# Altium PCB 1.PcbDoc
Units mm, origin at the board's own origin, x right, y up, seen from the top; angles counter-clockwise.
Board outline 91 x 97 mm, 2 copper layers (Top Layer, Bottom Layer); 12 components, 21 nets, 85 pads, 0 vias.
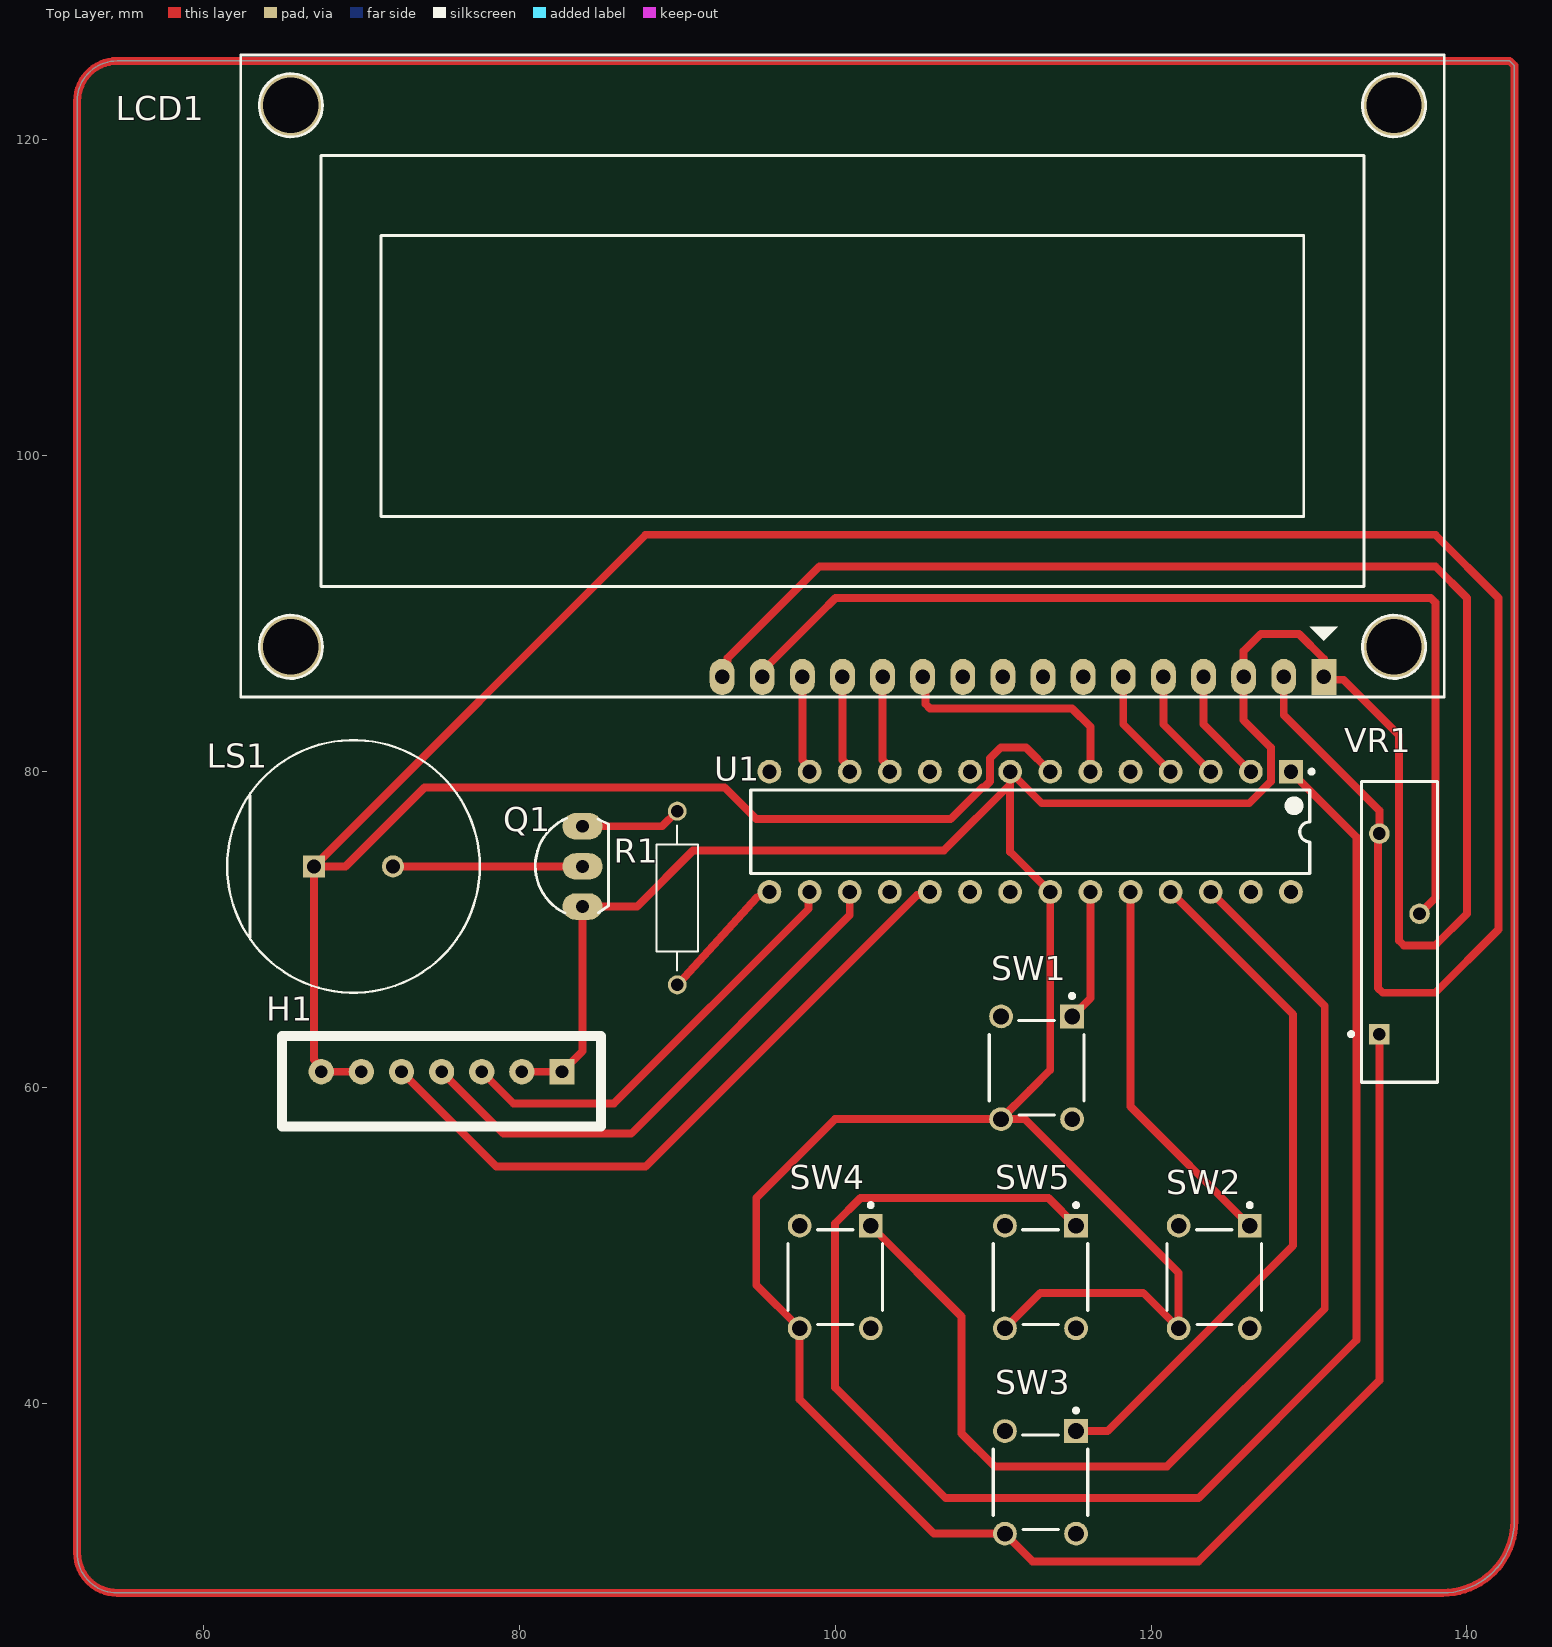
[diagram p0: Top Layer view]
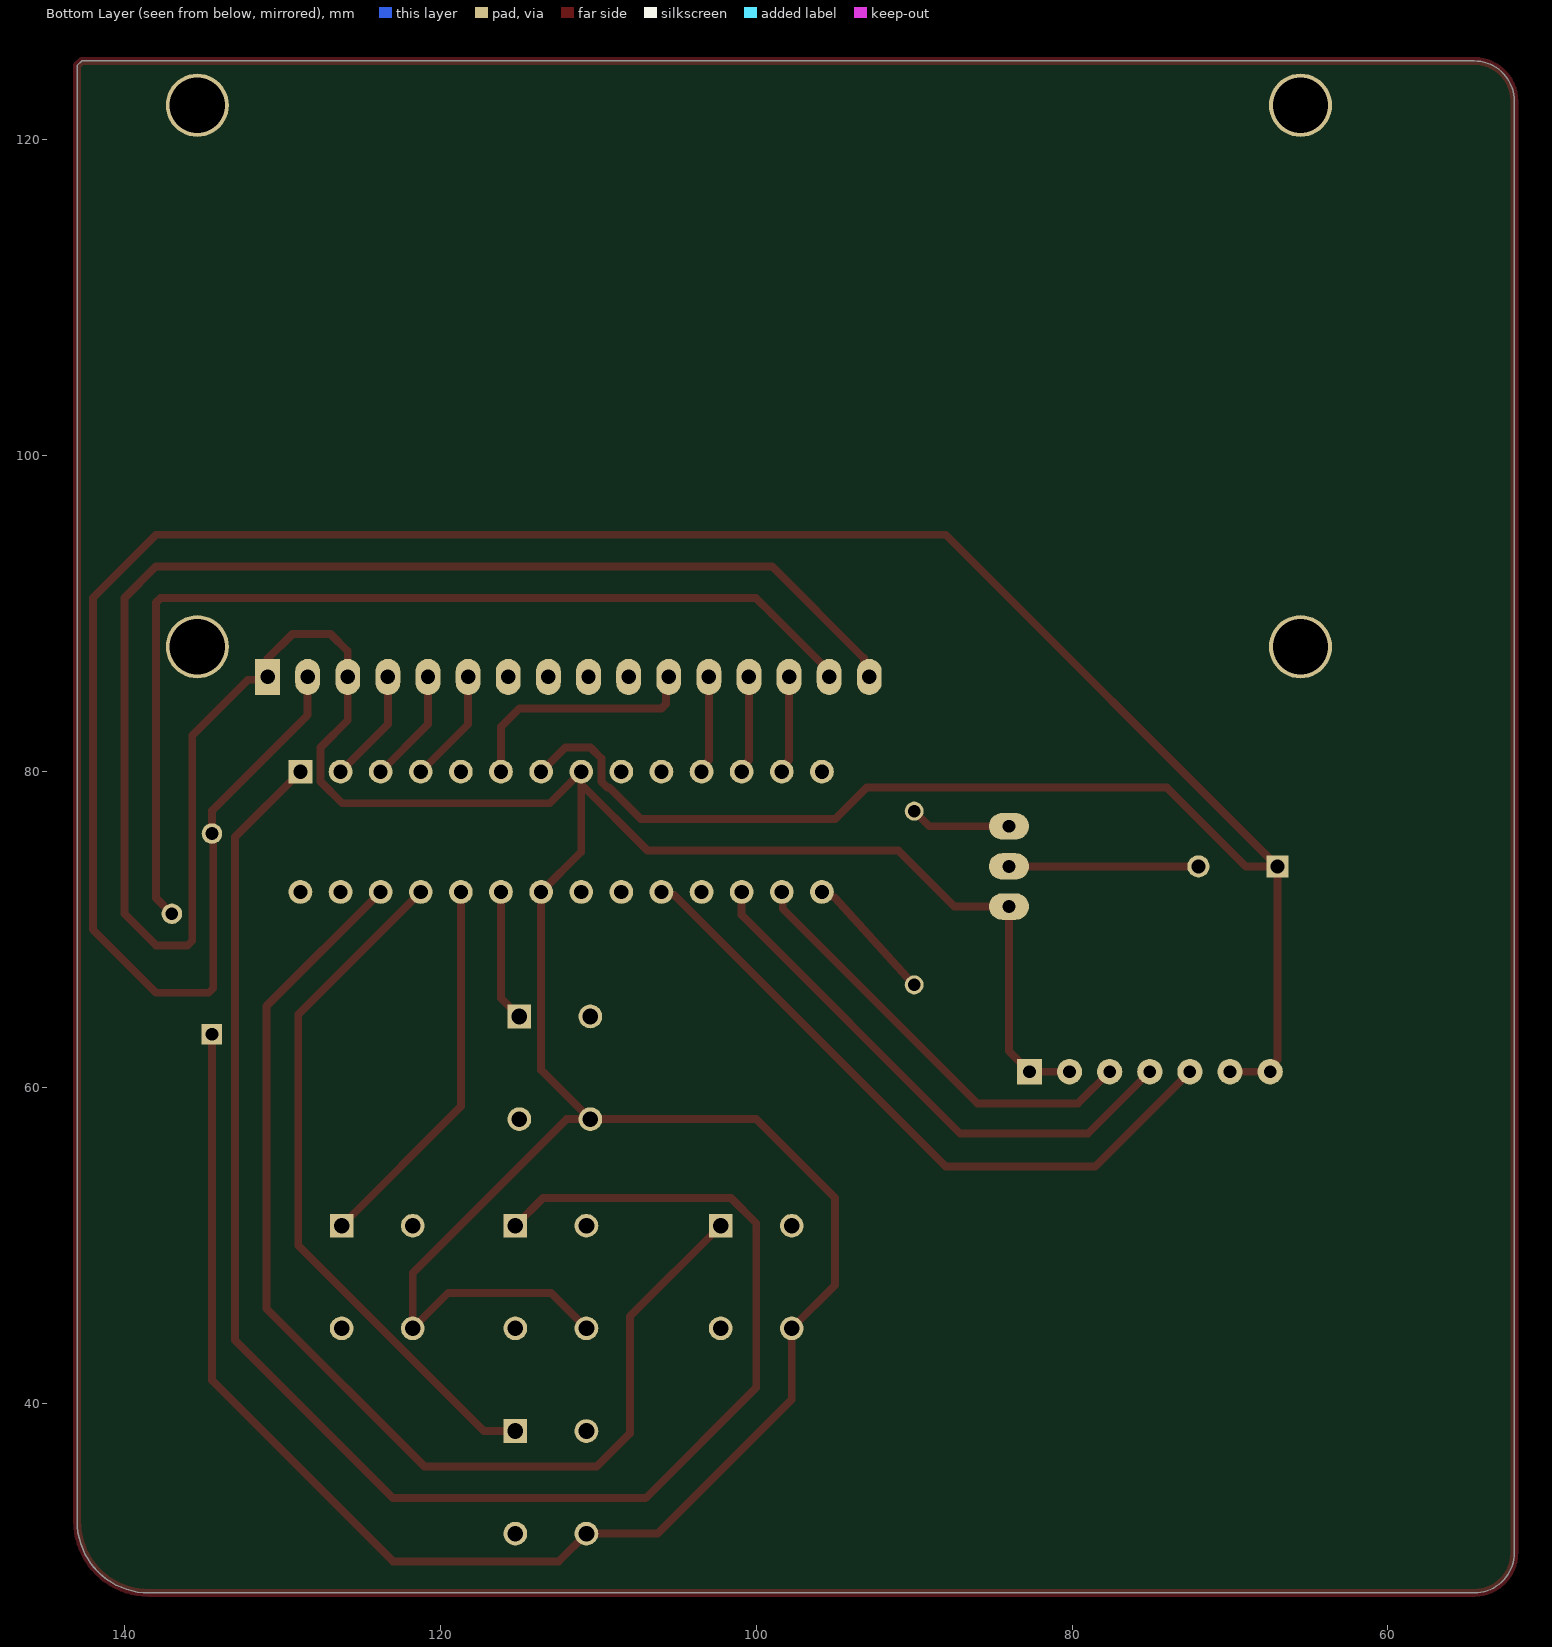
[diagram p1: Bottom Layer view, seen from below]

## Layer stack, top to bottom
Top Solder: solder mask 0.0102, Solder Resist, Dk 3.5
Top Layer: signal copper 0.0356
Dielectric 1: dielectric 0.32, FR-4, Dk 4.8
Bottom Layer: signal copper 0.0356
Bottom Solder: solder mask 0.0102, Solder Resist, Dk 3.5

## Board outline
52,30.54 52,122.46 cw(c54.54,122.46) 54.54,125 142.707,125 143,124.707 143,32.54 cw(c138.46,32.54) 138.46,28 54.54,28 cw(c54.54,30.54)

## Design rules (kind name [scope] priority, off if disabled: settings)
Clearance [All] p1: gap=0.254 ignorepadtopadclearanceinfootprint=FALSE
PolygonConnect [All] p1: connectstyle=Relief reliefconductorwidth=0.254 reliefentries=4 polygonreliefangle="90 Angle" airgapwidth=0.254
RoutingLayers [All] p1: top layer_v5=TRUE bottom layer_v5=FALSE
RoutingVias [All] p1: holewidth=0.711 width=1.27 viastyle="Through Hole" minholewidth=0.711 minwidth=1.27 maxholewidth=0.711 maxwidth=1.27
SolderMaskExpansion [All] p1: expansion=0.102 istentingtop=FALSE
SupplyNets "Schematic Supply Nets_1" [InNet('VCC')] p1: voltage=0.000
SupplyNets "Schematic Supply Nets" [InNet('GND')] p2: voltage=0.000
Width [All] p1: maxlimit=0.5 minlimit=0.5 preferedwidth=0.5
29 further rules are at their usual default settings.

## Classes and differential pairs
component class 1: H1 LCD1 LS1 Q1 R1 SW1 SW2 SW3 SW4 SW5 VR1

## Components (designator, comment, footprint, x,y, rotation, side; value= is the part's Value field where it differs from the comment)
H1 "Header 7P 2.54 Duc Thang" XH2.54M-7 82.7,61 r180 top
LCD1 "LCD1602 XL" LCD1602 130.94,86 r180 top
LS1 "SD1614TT-A5ME" FP-SD1614TT-A5ME-MFG 69.5,74 r0 top
Q1 "C1815" TO92 84,74 r90 top value=C9014
R1 "MFR-25FBF52-1K" RESAD1100W55L680D260 90,72 r90 top
SW1 "1825910-6" TECO-1825910-6_V 112.75,61.25 r270 top
SW2 "1825910-6" TECO-1825910-6_V 124,48 r270 top
SW3 "1825910-6" TECO-1825910-6_V 113,35 r270 top
SW4 "1825910-6" TECO-1825910-6_V 100,48 r270 top
SW5 "1825910-6" TECO-1825910-6_V 113,48 r270 top
U1 "ATmega328-PU" 28P3 112.35,76.19 r270 top
VR1 "3006P-1-201ZLF" BOUR-3006P-3_V 135.73,69.855 r90 top

## Footprints (in the part's own frame and the unit in brackets; to place one, negate y for a bottom-side part, rotate by r counter-clockwise, add the part's x,y. Pads: shape width x height; smd on the part's side, far side on the other; paste and mask are expansions set on the pad)
28P3 [mm] "28-Pin Plastic Dual In-Line Package (PDIP)"
  rect 1.5x1.5 hole 0.9: 1(-3.81,16.51)
  round 1.5 hole 0.9: 2(-3.81,13.97) 3(-3.81,11.43) 4(-3.81,8.89) 5(-3.81,6.35) 6(-3.81,3.81) 7(-3.81,1.27) 8(-3.81,-1.27) 9(-3.81,-3.81) 10(-3.81,-6.35) 11(-3.81,-8.89) 12(-3.81,-11.43) 13(-3.81,-13.97) 14(-3.81,-16.51) 15(3.81,-16.51) 16(3.81,-13.97) 17(3.81,-11.43) 18(3.81,-8.89) 19(3.81,-6.35) 20(3.81,-3.81) 21(3.81,-1.27) 22(3.81,1.27) 23(3.81,3.81) 24(3.81,6.35) 25(3.81,8.89) 26(3.81,11.43) 27(3.81,13.97) 28(3.81,16.51)
  silkscreen extent -3.93,-17.7 2.65,17.94, body extent -3.6,-17.65 3.6,17.65, height 4.58
BOUR-3006P-3_V [mm] "THD, 3-Leads, Body 19.05x4.83mm, Height 6.6mm"
  rect 1.3x1.3 hole 0.8: 1(-6.475,1.27)
  round 1.3 hole 0.8: 2(1.145,-1.27) 3(6.225,1.27)
  silkscreen extent -9.53,-2.42 9.52,3.19, body extent -9.53,-2.41 11.05,2.41, height 6.6
FP-SD1614TT-A5ME-MFG [mm]
  rect 1.4x1.4 hole 0.9 paste-2539.97 mask+0: 1(-2.5,0)
  round 1.4 hole 0.9 paste-2539.97 mask+0: 2(2.5,0)
  silkscreen extent -8,-8 8,8, body extent -8.1,-8.1 8.1,8.1, height 0.25
LCD1602 [mil] "LCD dipslay 16x2, 16 pin"
  rect 62x90 hole 36: 1(0,0)
  oval 62x90 hole 36: 2(100,0) 3(200,0) 4(300,0) 5(400,0) 6(500,0) 7(600,0) 8(700,0) 9(800,0) 10(900,0) 11(1000,0) 12(1100,0) 13(1200,0) 14(1300,0) 15(1400,0) 16(1500,0)
  round 157.48 hole 137.8: "Hole 0"(-175,-75) "Hole 0"(-175,-1425) "Hole 0"(2575,-1425) "Hole 0"(2575,-75)
  silkscreen extent -300,-1550 2700,50, body extent -315,-1360 2855,77, height 414
RESAD1100W55L680D260 [mm]
  round 1.2 hole 0.8: 1(-5.5,0) 2(5.5,0)
  silkscreen extent -4.58,-1.3 4.58,1.3, body extent -5.77,-1.2 5.77,1.2, height 2.4
TECO-1825910-6_V [mm] "Switch, 4-Leads, Body 5.99x5.99mm"
  rect 1.5x1.5 hole 0.99: 1(-3.25,2.25)
  round 1.5 hole 0.99: 2(3.25,2.25) 3(-3.25,-2.25) 4(3.25,-2.25)
  silkscreen extent -4.67,-2.99 3,3, body extent -3,-2.99 2.99,3, height 5
TO92 [mil] "TO-92"
  oval 66x100 hole 32: 1(-100,0) 2(0,0) 3(100,0)
  silkscreen extent -117,-65 120,118, body extent -109,-66 109,95, height 245
XH2.54M-7 [mm]
  rect 1.6x1.6 hole 0.8: 1(0,0)
  round 1.6 hole 0.8: 2(2.54,0) 3(5.08,0) 4(7.62,0) 5(10.16,0) 6(12.7,0) 7(15.24,0)
  silkscreen extent -2.48,-2.26 17.72,3.46, body extent -2.48,-2.26 17.72,3.48, height 6.91

## Part data
H1: "Cắm", Chung_Loai=Cắm, Don_Vi=Con, Ma_Hang=MH003369, Ten_Linh_Kien="Header 7P XH2.54-7P Đực Thẳng"
LCD1: "LCD 1602 Xanh Lá", CHIP=HD44780, Ma_Hang=67HZ, NCC=NSHOP, Ten="Màn hình LCD 1602 Xanh Lá"
LS1: library part CMP-08413-000006-1, "BUZZER MAGNETIC 5V 80DB 2048HZ 1"
Q1: "NPN transistor"
R1: "1.07 kOhms Â±1% 0.25W, 1/4W Through Hole Resistor Axial - Metal Film", Package="RADIAL-2 YAGEO", Check_prices=https://www.snapeda.com/parts/MFR-25FBF52-1K/Yageo/view-part/?ref=eda, MF=Yageo, MP=MFR-25FBF52-1K, SnapEDA_Link=https://www.snapeda.com/parts/MFR-25FBF52-1K/Yageo/view-part/?ref=snap
SW1 SW2 SW3 SW4 SW5: library part CMP-1684-00021-1, "Tact Switch, SPST-NO, 0.05 A, -35 to 85 degC, 4-Pin THD, RoHS, Bulk", Actuator Color=Black, Contact Rating @ Voltage=0.05A@24VDC, Dielectric Strength=500VAC, Manufacturer="TE Connectivity", Maximum AC Voltage Rating=N/A, Maximum Contact Resistance=100mOhm, Maximum DC Voltage Rating=24V, Minimum Insulation Resistance=100MOhm, Operating Temperature=-35to85C, Package Description="4-Pin Through Hole Device, Body 5.99 x 5.99 mm, Pitch 6.5 mm", Package Reference=THD, Actuator Length=1.4mm, Actuator Material=PolybutyleneTerephthalate, Actuator Style=RoundButton, Base Material=N/A, Body Orientation=Straight, Bushing Type=Unthreaded, Contact Material=CopperAlloy, Contact Plating=Silver, Datasheet URL=http://www.te.com/commerce/DocumentDelivery/DDEController?Action=showdoc&DocId=Customer+Drawing%7F1825910%7FC9%7Fpdf%7FEnglish%7FENG_CD_1825910_C9.pdf%7F1825910-6, Datasheet Version="Rev. C9", Dimension=5.99x5mm, Electrical Life=100000Cycles, Family=1825910, Function=MomentaryContact, Housing Material=N/A, Illumination=N/R, Manufacturer URL=http://www.te.com, Mechanical Life=100000Cycles, Mounting=ThroughHole, Packaging=N/A, Part No=1825910-6, Pole Throw Configuration=SPST, Product Weight=N/A, RoHS=Yes, Seal Description=N/A, Seal Location=N/A, Switch Configuration=OFF(ON), Terminal Type=PCPins, Thread Size=N/R
U1: library part CMP-0095-00015-2, "8-bit AVR Microcontroller, 32KB Flash, 1KB EEPROM, 2KB SRAM, 28-pin PDIP, Industrial Grade (-40°C to 85°C)", ComponentLink1Description="Manufacturer URL", ComponentLink1URL=http://www.atmel.com/, ComponentLink2Description="ATmega48A/48PA/88A/88PA/168A/168PA/328/328P Datasheet", ComponentLink2URL=http://www.atmel.com/dyn/resources/prod_documents/8271.pdf, ComponentLink3Description="ATmega48A/48PA/88A/88PA/168A/168PA/328/328P Summary", ComponentLink3URL=http://www.atmel.com/dyn/resources/prod_documents/8271S.pdf, DatasheetVersion="revD, May-2011", PackageDescription="28-lead (0.300\"/7.62mm Wide) Plastic Dual Inline Package (PDIP)", PackageReference=28P3, PackageVersion="revB, Sep-2001", RevisionNote="DatasheetVersion updated. URLs added."
VR1: library part CMP-0975-00016-2, "Trimming Potentiometer, 200 Ohm +/- 10%, -55 to 125 degC, 3-Pin 19.05 x 4.83 x 6.6 mm THD, RoHS", Manufacturer=Bourns, Resistance (Ohm)=200, Resistance Tolerance="+/- 10%", Temperature Range="-55 to 125 degC", ComponentLink1Description="Manufacturer URL", ComponentLink1URL=http://www.bourns.com/, ComponentLink2Description=Datasheet, ComponentLink2URL=http://www.bourns.com/data/global/pdfs/3006.pdf, ComponentLink3Description="Package Specification", ComponentLink3URL=http://www.bourns.com/data/global/pdfs/3006.pdf, DatasheetVersion=Apr-14, Mounting Technology="Through Hole", Number of Turns=15, PackageDescription="3-Pin THD, Body 19.05 x 4.83 mm, Height 6.6 mm", PackageReference=3006P-3, PackageVersion=Apr-14, PartNumber=3006P-1-201ZLF, RoHS=TRUE, Rotational Life="200 Cycles"

## Nets (pads, with @x,y where several pads share a name; then routed paths per layer and width w, separated by ;. In a path a pad name is that pad's centre, name@x,y a point inside that pad or via, vN(x,y) a via of type N, cw(c..) or ccw(c..) an arc to the next point about the centre after c; other vN are vias at no path point)
GND: H1.1 H1.2 LCD1.1 LCD1.3 LCD1.16 Q1.1 SW1.4 SW2.4 SW3.4 SW4.4 SW5.4 U1.8 U1.22 VR1.1 | length 329
  Top Layer w0.5: H1.2 H1.1 84,62.3 Q1.1 87.46,71.46 91,75 106.879,75 111.08,79.201 ; LCD1.16 92.84,86.646 93.185,86.991 93.185,87.185 99,93 138,93 140,91 140,71 138,69 136,69 135.707,69.293 135.707,82.293 132.185,85.816 131.124,85.816 LCD1.1 130.94,87.147 129.365,88.722 126.952,88.722 125.86,87.63 LCD1.3 125.86,83.258 127.584,81.534 127.584,79.375 126.209,78 113.08,78 U1.8 111.08,79.201 ; SW5.4 113,47 119.5,47 SW2.4 121.75,48.25 112,58 SW1.4 ; VR1.1 134.46,41.46 123,30 112.5,30 SW3.4 106.25,31.75 97.75,40.25 SW4.4 95,47.5 95,53 100,58 SW1.4 ; SW1.4 112.344,59.844 113.62,61.12 U1.22 111.08,74.92 111.08,79.201
MCU_PB1: R1.1 U1.15 | length 8.4
  Top Layer w0.5: R1.1 90.134,66.634 95.049,72.049 U1.15
MCU_PB2: H1.3 U1.16 | length 27.7
  Top Layer w0.5: H1.3 79.62,59 86,59 98.319,71.319 98.319,72.319 U1.16
MCU_PB3: H1.4 U1.17 | length 34.7
  Top Layer w0.5: H1.4 79,57.08 87.08,57.08 100.92,70.92 U1.17
MCU_PB5: H1.5 U1.19 | length 43.1
  Top Layer w0.5: H1.5 78.54,55 88,55 105.189,72.189 105.809,72.189 U1.19
MCU_PC0: SW1.1 U1.23 | length 8.4
  Top Layer w0.5: SW1.1 116.16,65.66 U1.23
MCU_PC1: SW2.1 U1.24 | length 24.3
  Top Layer w0.5: U1.24 118.7,58.8 SW2.1
MCU_PC2: SW3.1 U1.25 | length 44.2
  Top Layer w0.5: SW3.1 117.25,38.25 129,50 129,64.62 U1.25
MCU_PC3: SW4.1 U1.26 | length 72.9
  Top Layer w0.5: SW4.1 108,45.5 108,38.1 110.1,36 121,36 131,46 131,65.16 U1.26
MCU_PC6: SW5.1 U1.1 | length 104.8
  Top Layer w0.5: SW5.1 113.5,53 101.6,53 100,51.4 100,41 107,34 123,34 133,44 133,75.86 U1.1
MCU_PD0: LCD1.4 U1.2 | length 7.2
  Top Layer w0.5: LCD1.4 123.32,83 U1.2
MCU_PD1: LCD1.5 U1.3 | length 7.2
  Top Layer w0.5: LCD1.5 120.78,83 U1.3
MCU_PD2: LCD1.6 U1.4 | length 7.2
  Top Layer w0.5: LCD1.6 118.24,83 U1.4
MCU_PD4: LCD1.11 U1.6 | length 15.7
  Top Layer w0.5: LCD1.11 105.707,85.833 105.707,84.293 106,84 115,84 116.16,82.84 U1.6
MCU_PD5: LCD1.12 U1.11 | length 6.2
  Top Layer w0.5: LCD1.12 103,80.731 103.46,80.271 U1.11
MCU_PD6: LCD1.13 U1.12 | length 6.2
  Top Layer w0.5: LCD1.13 100.46,80.731 100.92,80.271 U1.12
MCU_PD7: LCD1.14 U1.13 | length 6.2
  Top Layer w0.5: LCD1.14 97.92,80.731 98.38,80.271 U1.13
NetLCD1_15: LCD1.15 VR1.2 | length 65.1
  Top Layer w0.5: LCD1.15 95.38,86.356 99.024,90 100.024,91 133.142,91 137.707,91 138,90.707 138,72 VR1.2
NetLS1_2: LS1.2 Q1.2 | length 12
  Top Layer w0.5: LS1.2 Q1.2
NetQ1_3: Q1.3 R1.2 | length 6.4
  Top Layer w0.5: Q1.3 89.04,76.54 R1.2
VCC: H1.6 H1.7 LCD1.2 LS1.1 U1.7 VR1.3 | length 206.6
  Top Layer w0.5: H1.6 H1.7 67.46,61.298 67,61.758 LS1.1 ; U1.7 112.086,81.534 110.49,81.534 109.804,80.848 109.804,79.375 109.429,79 109.313,79 107.313,77 95,77 93,79 74,79 69,74 LS1.1 ; LCD1.2 128.4,83.591 134.46,77.531 VR1.3 134.377,75.997 134.377,66.293 134.669,66 138,66 142,70 142,91 138,95 88,95 LS1.1
pads on no net: "LCD1.Hole 0" LCD1.7 LCD1.8 LCD1.9 LCD1.10 SW1.2 SW1.3 SW2.2 SW2.3 SW3.2 SW3.3 SW4.2 SW4.3 SW5.2 SW5.3 U1.5 U1.9 U1.10 U1.14 U1.18 U1.20 U1.21 U1.27 U1.28
copper on no net: | length 371.7
  Top Layer w0.5: 52,30.54 ccw(c54.54,30.54) 54.54,28 65,28 138.46,28 ccw(c138.46,32.54) 143,32.54 143,57.875 143,124.707 142.707,125 54.54,125 ccw(c54.54,122.46) 52,122.46 52,121 52,30.54